# Altium PCB SFCmasterD.PcbDoc (part 6 of 7)
Units mm, origin at the board's own origin, x right, y up, seen from the top; angles counter-clockwise.
Board outline 152.4 x 101.6 mm, 2 copper layers (Top Layer, Bottom Layer); 249 components, 250 nets, 987 pads, 265 vias.
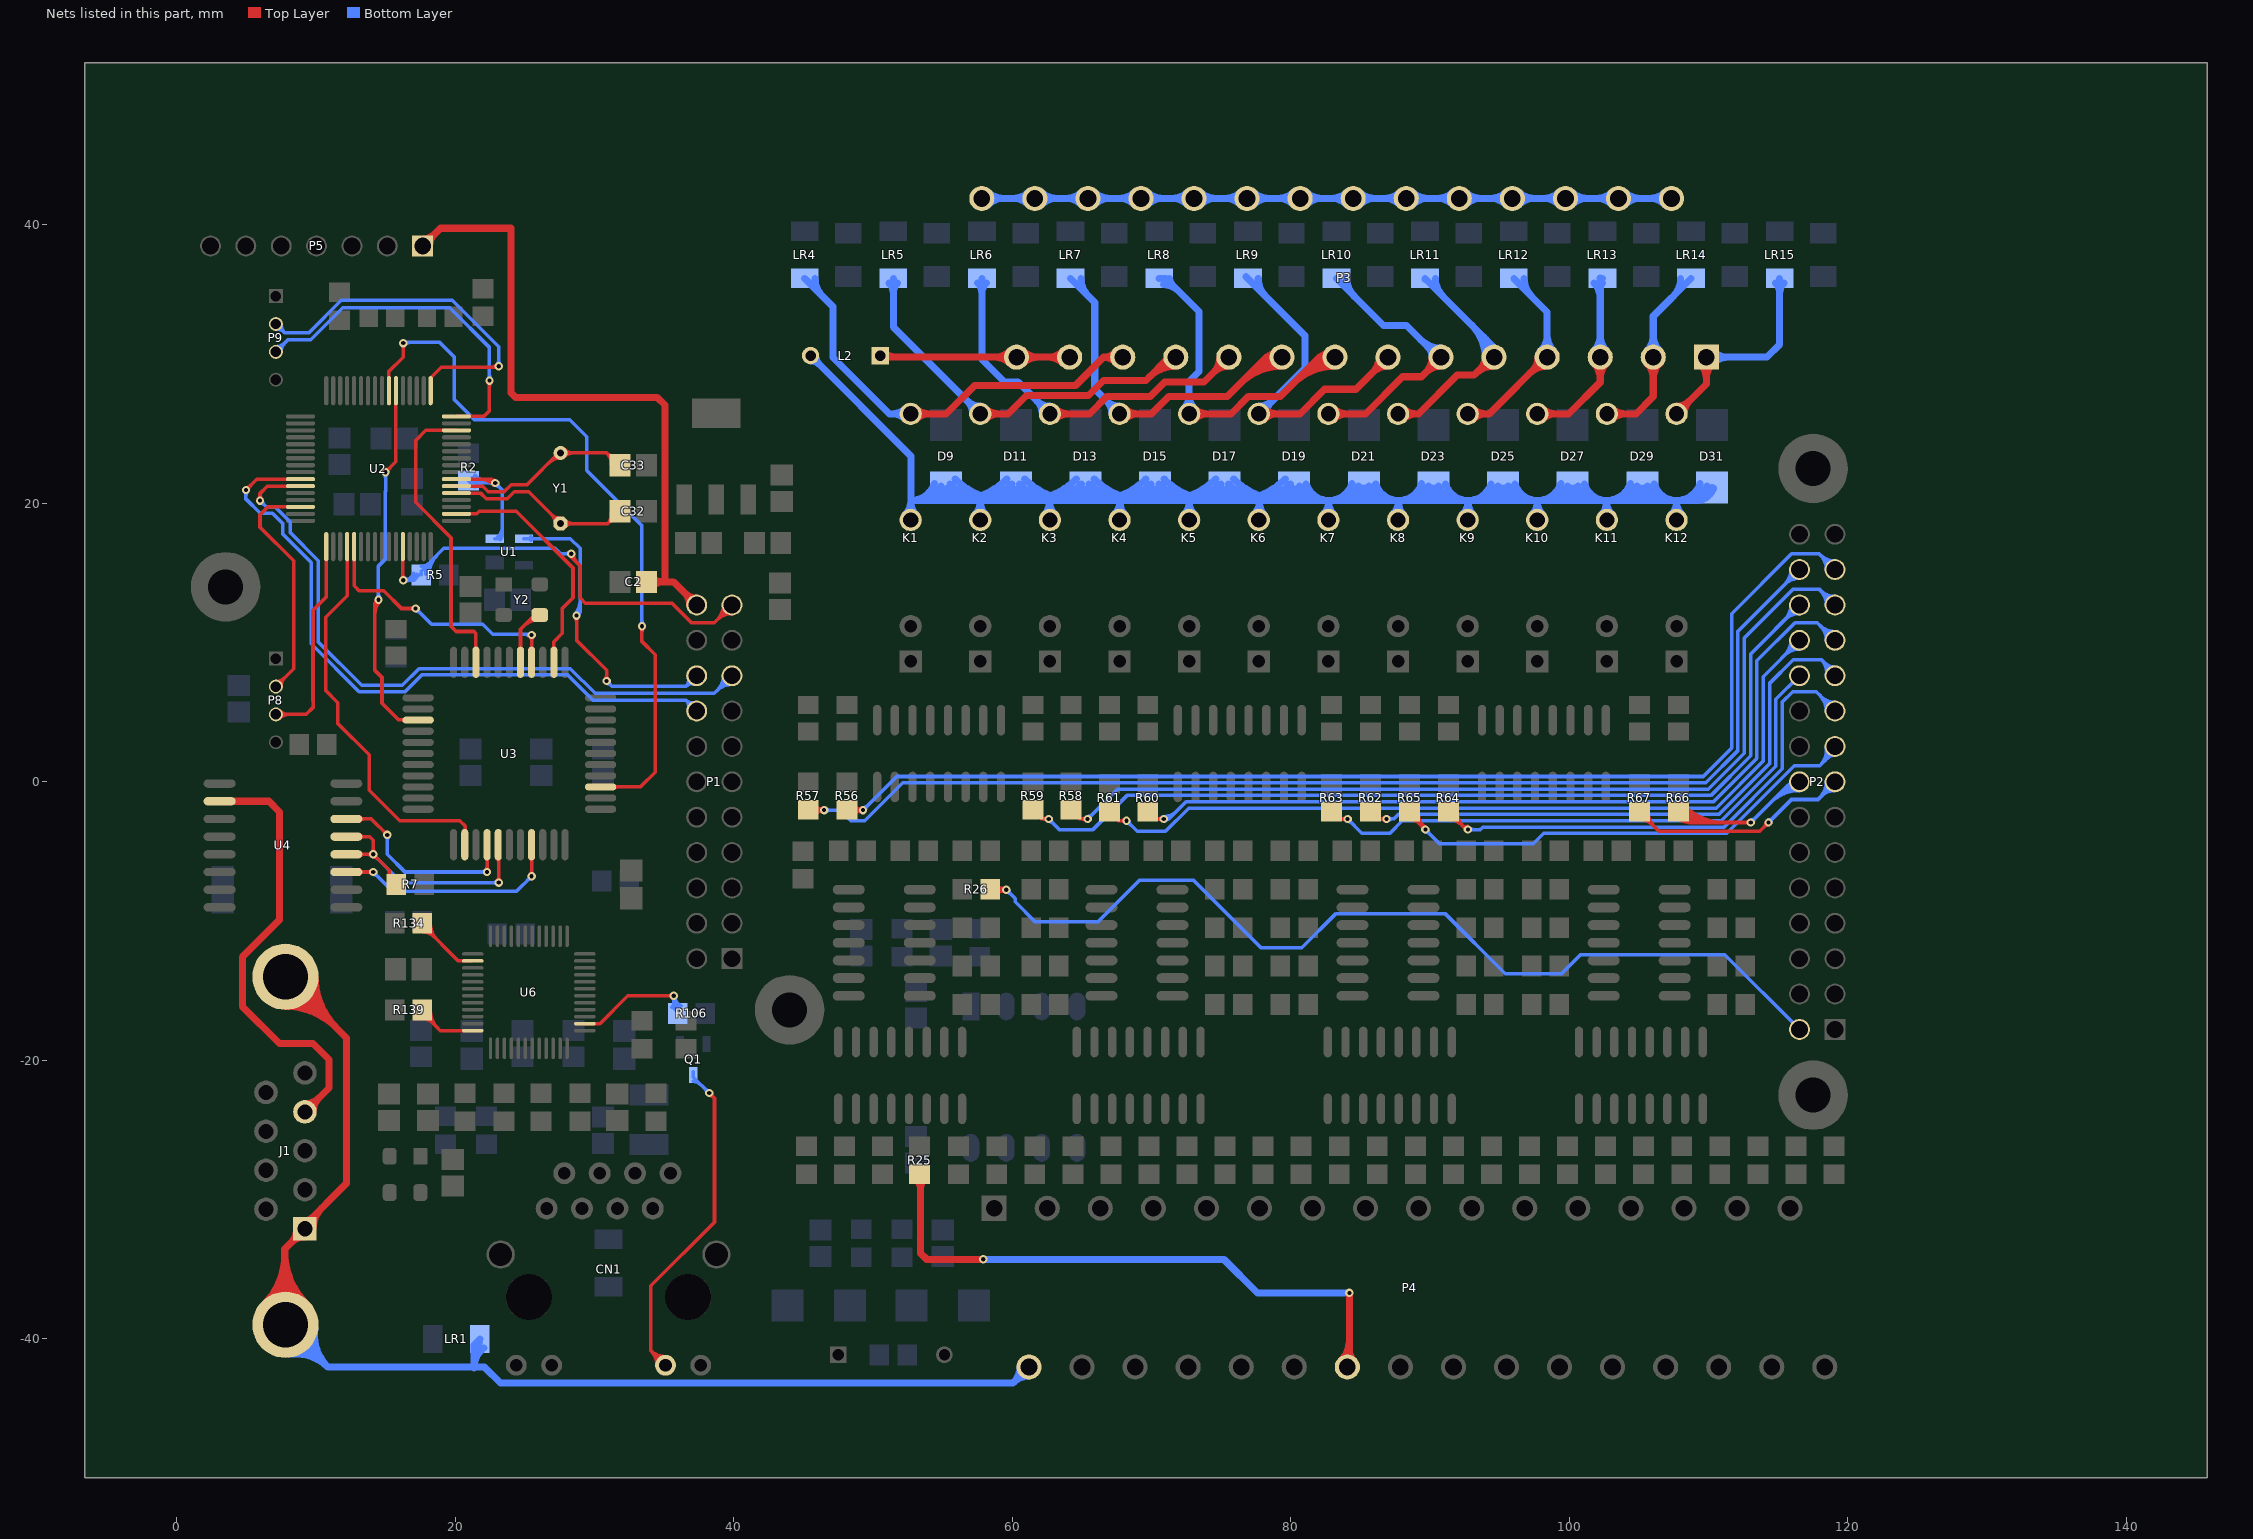
[diagram p6: the nets of this part, all layers, seen from the top]

## Via types
v1: diameter 0.6, hole 0.3, Top Layer to Bottom Layer, 265 vias

## Nets (pads, with @x,y where several pads share a name; then routed paths per layer and width w, separated by ;. In a path a pad name is that pad's centre, name@x,y a point inside that pad or via, vN(x,y) a via of type N, cw(c..) or ccw(c..) an arc to the next point about the centre after c; other vN are vias at no path point) (continued)
NetR106_1: R106.1 U6.14 | length 13
  Top Layer w0.254: U6.14@29.298,-17.363 30.385,-17.363 32.381,-15.367 v1(35.687,-15.367) ; v1@35.565,-15.489 ccw(c35.269,-15.785) 35.269,-15.367 ccw(c35.269,-14.949) v1@35.565,-15.245
  Bottom Layer w0.25: R106.1@35.55,-16.18 ccw(c35.221,-15.851) 35.687,-15.851 ; v1@35.563,-15.491 cw(c35.265,-15.789) 35.687,-15.789 cw(c36.109,-15.789) v1@35.811,-15.491 ; v1@35.623,-15.53 cw(c35.501,-15.842) 35.825,-15.756 ; v1@35.687,-15.639 ccw(c36.415,-15.639) R106.1@36.098,-16.294 ; 35.753,-15.885 cw(c36.23,-15.757) v1@35.829,-15.469 ; 35.808,-15.69 cw(c36.107,-15.61) v1@35.839,-15.454 ; R106.1@35.83,-16.383 35.83,-16.399 35.687,-16.256 35.687,-15.24 ccw(c36.608,-15.24) R106.1@36.207,-16.069
NetR134_2: R134.2 U6.38 | length 7.4
  Top Layer w0.254: R134.2@17.637,-10.783 cw(c17.637,-11.98) 18.484,-11.134 ; R134.2@17.764,-10.414 20.213,-12.863 U6.38@21.248,-12.863 ; R134.2@17.956,-10.21 ccw(c18.912,-10.21) R134.2@18.236,-10.886 ; R134.2@18.21,-10.21 ccw(c19.779,-10.21) 18.67,-11.32
NetR139_2: R139.2 U6.48 | length 7.2
  Top Layer w0.25: R139.2@17.637,-17.008 cw(c17.637,-18.028) 18.358,-17.307 ; R139.2@17.637,-16.586 18.914,-17.863 U6.48@21.248,-17.863 ; R139.2@17.962,-16.433 ccw(c19.115,-16.433) 18.3,-17.248 ; R139.2@18.212,-16.433 ccw(c19.969,-16.433) 18.727,-17.675
OSC_IN: C32.2 U2.5 Y1.1 | length 18.5
  Top Layer w0.254: U2.5@20.078,20.738 21.807,20.738 22.225,20.32 23.718,20.32 24.226,20.828 25.273,20.828 Y1.1@27.559,18.542 30.927,18.542 ; Y1.1@27.186,18.542 ccw(c26.286,18.542) 26.922,19.179 ccw(c27.559,19.815) Y1.1@27.559,18.915 ; Y1.1@27.823,18.278 cw(c28.459,17.642) 28.459,18.542 cw(c28.459,19.442) Y1.1@27.823,18.806 ; C32.2@31.197,19.312 cw(c30.262,19.207) 30.927,18.542 ; C32.2@31.26,18.875 cw(c31.635,18.501) C32.2@31.742,19.02 ; C32.2@31.69,18.771 ccw(c31.521,17.948) 30.927,18.542 ; C32.2@31.816,19.431 30.927,18.542
OSC_OUT: C33.2 U2.6 Y1.2 | length 19.2
  Top Layer w0.254: U2.6@20.078,21.218 21.969,21.218 22.359,20.828 23.495,20.828 24.003,21.336 25.146,21.336 27.432,23.622 30.861,23.622 ; 26.705,22.895 cw(c27.559,22.042) Y1.2@27.559,23.249 ; 27.012,23.202 ccw(c26.592,23.622) Y1.2@27.186,23.622 ; 27.139,23.329 cw(c27.559,22.909) Y1.2@27.559,23.503 ; Y1.2@27.823,23.358 cw(c28.459,22.722) 28.459,23.622 cw(c28.459,24.522) Y1.2@27.823,23.886 ; C33.2@31.184,23.299 ccw(c31.599,23.714) C33.2@31.732,23.142 ; C33.2@31.193,22.796 ccw(c30.059,22.82) 30.861,23.622 ; C33.2@31.674,23.39 cw(c31.477,24.238) 30.861,23.622 ; C33.2@31.846,22.637 30.861,23.622
RMT_STARTUP_IN: P2.2 R26.2 | length 72.3
  Top Layer w0.254: R26.2@58.404,-7.715 58.436,-7.747 v1(59.563,-7.747) ; R26.2@58.85,-7.406 ccw(c59.563,-6.832) v1(59.563,-7.747) ; R26.2@58.868,-8.102 cw(c59.563,-8.605) v1(59.563,-7.747) ; v1@59.413,-7.833 ccw(c59.052,-8.042) 59.16,-7.639 ccw(c59.268,-7.235) v1@59.477,-7.597 ; v1@59.413,-7.66 cw(c59.052,-7.452) 59.16,-7.855 cw(c59.268,-8.259) v1@59.476,-7.897 ; v1@59.441,-7.869 ccw(c59.145,-8.165) 59.145,-7.747 ccw(c59.145,-7.329) v1@59.441,-7.625
  Bottom Layer w0.254: v1@59.563,-7.92 cw(c59.563,-8.338) 59.858,-8.042 cw(c60.154,-7.747) v1@59.736,-7.747 ; v1(59.563,-7.747) 60.198,-8.382 60.198,-8.622 61.609,-10.033 66.16,-10.033 69.109,-7.084 73.018,-7.084 77.853,-11.919 80.784,-11.919 83.244,-9.459 91.072,-9.459 95.39,-13.777 99.436,-13.777 100.795,-12.418 111.168,-12.418 P2.2@116.53,-17.78
RMT_STARTUP_PORT: P4.14 R25.2 | length 47.3
  Top Layer w0.508: R25.2@53.075,-28.493 cw(c52.264,-29.304) 53.411,-29.304 ; 53.411,-29.205 cw(c54.417,-29.205) R25.2@53.705,-28.493 ; R25.2@53.411,-28.178 53.411,-33.853 53.848,-34.29 v1(57.912,-34.29) ; P4.14@83.597,-41.565 ccw(c82.14,-40.108) 84.201,-40.108 ; P4.14@84.054,-42.022 84.201,-41.875 v1(84.201,-36.703) ; 84.201,-40.817 ccw(c85.259,-40.817) P4.14@84.511,-41.565
  Bottom Layer w0.508: v1@57.785,-34.29 75.184,-34.29 77.597,-36.703 v1(84.201,-36.703)
RTS(PIN4): J1.4 U4.10 | length 34.2
  Top Layer w0.508: U4.10@3.07,-1.397 6.604,-1.397 7.366,-2.159 7.366,-9.906 4.699,-12.573 4.699,-16.129 7.366,-18.796 9.779,-18.796 10.922,-19.939 10.922,-21.979 J1.4@9.199,-23.702 ; J1.4@9.199,-23.111 ccw(c9.199,-21.684) 10.208,-22.693 ccw(c11.217,-23.702) J1.4@9.79,-23.702
SHIELD_GND: J1.1 J1.10 J1.11 LR1.2 P4.2 | length 144.4
  Top Layer w0.508: J1.10@6.297,-37.492 ccw(c2.795,-33.99) 7.747,-33.99 ; J1.10@6.656,-37.851 ccw(c4.022,-35.217) 7.747,-35.217 ; J1.10@7.015,-38.21 ccw(c5.248,-36.443) 7.747,-36.443 ; J1.10@7.747,-39.243 7.747,-33.548 J1.1@9.199,-32.096 9.199,-31.822 12.192,-28.829 12.192,-18.397 J1.11@7.8,-14.005 ; 7.747,-36.187 ccw(c10.608,-36.187) J1.10@8.585,-38.21 ; 7.747,-34.961 ccw(c11.834,-34.961) J1.10@8.944,-37.851 ; 7.747,-33.734 ccw(c13.061,-33.734) J1.10@9.303,-37.492 ; J1.11@7.8,-16.131 cw(c7.8,-21.264) 11.429,-17.634 cw(c15.059,-14.005) J1.11@9.926,-14.005 ; J1.11@7.8,-15.623 cw(c7.8,-19.529) 10.562,-16.767 cw(c13.324,-14.005) J1.11@9.418,-14.005 ; J1.11@7.8,-15.115 cw(c7.8,-17.795) 9.695,-15.9 cw(c11.59,-14.005) J1.11@8.91,-14.005 ; J1.1@8.608,-32.096 cw(c7.181,-32.096) 8.19,-33.105 cw(c9.199,-34.114) J1.1@9.199,-32.687 ; J1.1@9.199,-31.505 ccw(c9.199,-30.74) J1.1@9.74,-31.281 ; J1.1@9.79,-32.096 cw(c11.878,-32.096) 10.402,-30.619
  Bottom Layer w0.508: J1.10@7.8,-38.995 10.842,-42.037 ; J1.10@8.014,-40.599 cw(c8.345,-43.08) 10.115,-41.31 cw(c11.885,-39.54) J1.10@9.404,-39.209 ; J1.10@8.081,-41.102 cw(c8.516,-44.363) 10.842,-42.037 ; J1.10@9.907,-39.276 ccw(c13.168,-39.711) 10.842,-42.037 ; 21.336,-42.09 cw(c23.146,-42.09) LR1.2@22.039,-40.658 ; 21.336,-41.055 cw(c22.346,-41.055) LR1.2@21.728,-40.256 ; LR1.2@21.766,-40.005 21.336,-40.435 21.336,-42.037 22.098,-42.037 ; P4.2@60.548,-42.022 cw(c58.988,-42.022) 60.091,-43.125 cw(c61.194,-44.228) P4.2@61.194,-42.668 ; P4.2@61.194,-42.022 60.047,-43.169 23.23,-43.169 22.098,-42.037 ; 10.842,-42.037 22.098,-42.037
SPEEDLED2: CN1.11 Q1.3 | length 29.6
  Top Layer w0.254: CN1.11@34.462,-41.889 ccw(c33.007,-41.875) 34.036,-40.846 ; CN1.11@34.716,-41.891 ccw(c33.855,-41.883) 34.464,-41.274 ccw(c35.073,-40.665) CN1.11@35.081,-41.526 ; CN1.11@35.079,-41.272 cw(c35.065,-39.817) 34.036,-40.846 ; CN1.11@35.085,-41.895 34.036,-40.846 ; v1@38.227,-22.525 cw(c38.227,-22.943) 38.522,-22.647 cw(c38.818,-22.352) v1@38.4,-22.352 ; v1(38.227,-22.352) 38.608,-22.733 38.608,-31.623 34.036,-36.195 34.036,-40.846
  Bottom Layer w0.254: Q1.3@37.084,-21.512 cw(c37.084,-22.244) 37.601,-21.726 ; Q1.3@37.084,-20.81 37.084,-21.209 v1(38.227,-22.352) ; v1@38.054,-22.352 ccw(c37.636,-22.352) 37.932,-22.057 ccw(c38.227,-21.761) v1@38.227,-22.179
SUB_SYS_BOOTSEL: P1.21 R5.2 U2.60 | length 43.5
  Top Layer w0.254: v1@16.134,14.6 ccw(c15.906,14.828) 16.228,14.828 ; v1@16.228,14.351 U2.60@16.228,16.888 ; 16.228,14.963 ccw(c16.741,14.963) v1@16.378,14.6 ; v1(28.321,16.383) 28.321,16.129 28.956,15.494 28.956,13.208 29.337,12.827 35.56,12.827 36.957,11.43 38.6,11.43 P1.21@39.87,12.7 ; v1@28.494,16.383 ccw(c29.525,16.383) 28.796,15.654 ; P1.21@39.247,12.7 cw(c37.743,12.7) 38.806,11.636 cw(c39.87,10.573) P1.21@39.87,12.077 ; P1.21@39.501,12.7 cw(c38.61,12.7) 39.24,12.07 cw(c39.87,11.44) P1.21@39.87,12.331
  Bottom Layer w0.254: v1(16.256,14.478) v1@16.256,14.462 ; v1@16.363,14.614 ccw(c16.546,14.846) 16.623,14.56 ccw(c16.715,14.218) v1@16.407,14.393 ; v1@16.378,14.356 cw(c16.635,14.099) 16.635,14.462 ; v1@16.378,14.6 ccw(c16.712,14.934) 16.712,14.462 ; 16.611,14.462 ccw(c16.611,15.127) R5.2@17.24,14.912 ; R5.2@17,14.994 cw(c16.256,15.248) v1@16.256,14.462 ; R5.2@17.415,14.859 17.018,14.462 v1@16.256,14.462 ; R5.2@17.542,14.859 17.542,15.129 19.177,16.764 27.178,16.764 27.559,16.383 v1(28.321,16.383) ; R5.2@17.542,15.482 ccw(c17.542,16.334) 18.145,15.732 ; R5.2@17.861,14.909 cw(c19.162,14.909) 18.242,15.829 ; R5.2@18.115,14.909 cw(c20.029,14.909) 18.676,16.263 ; v1@28.199,16.261 ccw(c27.903,15.965) 27.903,16.383 ccw(c27.903,16.801) v1@28.199,16.505
SUB_SYS_RST: P1.18 U1.3 | length 27.2
  Top Layer w0.254: v1@28.58,11.816 cw(c28.284,11.52) 28.702,11.52 cw(c29.12,11.52) v1@28.824,11.816 ; v1(28.702,11.938) 28.702,10.16 30.861,8.001 v1(30.861,7.239) ; v1@30.739,7.361 ccw(c30.443,7.657) 30.861,7.657 ccw(c31.279,7.657) v1@30.983,7.361
  Bottom Layer w0.254: U1.3@24.926,17.46 28.26,17.46 28.956,16.764 28.956,12.192 v1(28.702,11.938) ; U1.3@25.398,17.338 cw(c25.694,17.042) 25.694,17.46 cw(c25.694,17.878) U1.3@25.398,17.582 ; v1@28.58,12.06 ccw(c27.671,12.969) 28.956,12.969 ; v1@28.759,11.881 ccw(c28.284,12.356) 28.956,12.356 ; v1@30.861,7.066 cw(c30.861,6.648) 31.156,6.944 cw(c31.452,7.239) v1@31.034,7.239 ; v1(30.861,7.239) 31.242,6.858 36.568,6.858 ; P1.18@36.728,7.458 cw(c36.129,7.297) 36.568,6.858 ; P1.18@37.168,7.018 ccw(c37.007,6.419) 36.568,6.858 ; P1.18@37.33,7.62 36.568,6.858
SYS_NRST: R2.1 U1.2 U2.7 | length 18.1
  Top Layer w0.254: U2.7@20.078,21.738 22.585,21.738 ; 21.777,21.738 cw(c21.777,20.38) v1@22.738,21.341 ; 22.391,21.738 cw(c22.391,20.994) v1@22.917,21.52 ; v1@22.687,21.472 ccw(c22.336,21.49) 22.585,21.738 ; v1@22.851,21.636 cw(c22.833,21.987) 22.585,21.738 ; v1(22.86,21.463) 22.585,21.738
  Bottom Layer w0.254: R2.1@20.955,21.606 21.098,21.463 v1(22.86,21.463) 23.368,20.955 23.368,17.653 23.175,17.46 U1.2@22.826,17.46 ; R2.1@21.231,21.832 ccw(c22.12,22.721) 22.12,21.463 ; R2.1@21.41,21.201 cw(c22.043,20.568) 22.043,21.463 ; R2.1@21.41,22.011 ccw(c22.734,23.335) v1@22.734,21.463 ; 22.374,21.556 ccw(c22.505,22.065) v1@22.772,21.612 ; 22.522,21.518 cw(c22.444,21.218) v1@22.711,21.375 ; v1@22.738,21.341 ccw(c22.442,21.045) 22.442,21.463 ccw(c22.442,21.881) v1@22.738,21.585 ; v1@22.86,21.29 cw(c22.86,20.872) 23.155,21.168 cw(c23.451,21.463) v1@23.033,21.463 ; U1.2@23.054,17.582 ccw(c22.295,18.341) 23.368,18.341 ; U1.2@23.233,17.403 ccw(c22.908,17.728) U1.2@23.368,17.728
SYS_SWCLK: P8.3 U2.49 | length 16.3
  Top Layer w0.254: P8.3@7.112,4.842 9.287,4.842 9.779,5.334 9.779,5.835 9.776,5.838 9.776,12.316 10.728,13.268 U2.49@10.728,16.951 ; P8.3@7.376,4.578 cw(c8.012,3.941) 8.012,4.842 cw(c8.012,5.742) P8.3@7.376,5.106
SYS_SWDIO: P8.2 U2.46 | length 18.4
  Top Layer w0.254: P8.2@7.112,6.842 8.382,8.112 8.382,15.875 5.969,18.288 5.969,19.177 6.53,19.738 U2.46@8.878,19.738 U2.46@8.901,19.715 ; P8.2@7.112,7.215 ccw(c7.112,8.115) 7.749,7.479 ccw(c8.385,6.842) P8.2@7.485,6.842
USART2_RX: P9.2 U2.17 | length 28.7
  Top Layer w0.254: U2.17@18.228,28.088 18.228,29.023 18.977,29.772 23.077,29.772 v1@23.114,29.809 ; 22.52,29.772 ccw(c22.52,30.439) v1@22.992,29.967
  Bottom Layer w0.254: P9.2@7.112,32.877 7.731,32.258 ; P9.2@7.12,32.504 cw(c7.137,31.664) 7.731,32.258 ; P9.2@7.485,32.869 ccw(c8.325,32.852) 7.731,32.258 ; v1@22.992,29.967 ccw(c22.696,30.263) 23.114,30.263 ccw(c23.532,30.263) v1@23.236,29.967 ; v1(23.114,29.845) 23.114,31.242 19.781,34.575 11.807,34.575 9.49,32.258 7.731,32.258
USART2_TX: P9.3 U2.16 | length 27.6
  Top Layer w0.254: U2.16@20.078,26.238 22.038,26.238 22.449,26.649 v1(22.449,28.808) ; v1@22.327,28.686 cw(c22.031,28.391) 22.449,28.391 cw(c22.867,28.391) v1@22.571,28.686
  Bottom Layer w0.254: P9.3@7.112,30.877 7.977,31.742 9.616,31.742 11.91,34.036 19.607,34.036 22.449,31.194 v1(22.449,28.808) ; P9.3@7.112,31.25 ccw(c7.112,32.15) 7.749,31.514 ccw(c8.385,30.877) P9.3@7.485,30.877 ; v1@22.327,28.931 ccw(c22.031,29.226) 22.449,29.226 ccw(c22.867,29.226) v1@22.571,28.931
USART_DP_RX: P1.16 U2.42 | length 51
  Top Layer w0.254: v1(4.962,20.955) 5.746,21.738 U2.42@8.878,21.738 ; v1@4.962,21.128 ccw(c4.962,21.546) 5.258,21.25 ccw(c5.553,20.955) v1@5.135,20.955
  Bottom Layer w0.254: v1@4.84,20.833 cw(c4.545,20.537) 4.962,20.537 cw(c5.38,20.537) v1@5.085,20.833 ; v1(4.962,20.955) 4.962,20.311 5.977,19.296 6.864,19.296 7.62,18.54 7.62,17.78 9.652,15.748 9.652,9.906 13.081,6.477 16.383,6.477 17.58,7.674 28.073,7.674 29.905,5.842 36.568,5.842 ; P1.16@36.728,5.242 ccw(c36.129,5.403) 36.568,5.842 ; P1.16@37.168,5.682 cw(c37.007,6.281) 36.568,5.842 ; P1.16@37.33,5.08 36.568,5.842
USART_DP_TX: P1.17 U2.43 | length 53.7
  Top Layer w0.254: v1@5.847,20.315 ccw(c5.551,20.611) 5.969,20.611 ccw(c6.387,20.611) v1@6.091,20.315 ; v1(5.969,20.193) 5.969,20.701 6.483,21.215 8.855,21.215 U2.43@8.878,21.238
  Bottom Layer w0.254: v1@5.969,20.02 cw(c5.969,19.602) 6.264,19.898 cw(c6.56,20.193) v1@6.142,20.193 ; v1(5.969,20.193) 6.412,19.75 7.052,19.75 8.128,18.674 8.128,17.914 10.16,15.882 10.16,10.04 13.269,6.931 16.195,6.931 17.392,8.128 28.261,8.128 30.039,6.35 38.6,6.35 P1.17@39.87,7.62 ; P1.17@39.247,7.62 cw(c37.743,7.62) 38.806,6.556 cw(c39.87,5.493) P1.17@39.87,6.997 ; P1.17@39.501,7.62 cw(c38.61,7.62) 39.24,6.99 cw(c39.87,6.36) P1.17@39.87,7.251
VALVE_DRIVER1_ON: K3.3 LR6.1 P3.19 | length 35.1
  Top Layer w0.508: K3.3@62.696,26.424 65.54,26.424 66.802,27.686 69.927,27.686 70.943,28.702 73.752,28.702 P3.19@75.545,30.495 ; K3.3@63.082,26.038 cw(c64.014,25.106) 64.014,26.424 cw(c64.014,27.742) K3.3@63.082,26.81 ; P3.19@74.899,30.495 cw(c73.339,30.495) 74.442,29.392 cw(c75.545,28.289) P3.19@75.545,29.849
  Bottom Layer w0.508: LR6.1@57.5,35.831 cw(c56.739,35.069) 57.816,35.069 cw(c58.893,35.069) LR6.1@58.131,35.831 ; LR6.1@57.816,36.146 57.816,30.322 59.436,28.702 60.418,28.702 K3.3@62.696,26.424 ; K3.3@62.15,26.424 ccw(c60.832,26.424) 61.764,27.356 ccw(c62.696,28.288) K3.3@62.696,26.97
VALVE_DRIVER2_ON: K4.3 LR7.1 P3.17 | length 38.5
  Top Layer w0.508: K4.3@67.696,26.424 69.977,26.424 71.239,27.686 75.438,27.686 78.247,30.495 ; K4.3@68.082,26.038 cw(c69.014,25.106) 69.014,26.424 cw(c69.014,27.742) K4.3@68.082,26.81 ; 76.361,28.609 cw(c79.355,25.614) P3.17@79.355,29.849 ; 77.228,29.476 cw(c79.355,27.349) P3.17@79.355,30.357 ; 78.095,30.343 cw(c79.355,29.083) P3.17@79.355,30.865 ; P3.17@78.793,30.177 ccw(c78.247,29.868) 78.247,30.495 ; P3.17@78.793,30.813 cw(c78.247,31.122) 78.247,30.495 ; P3.17@79.355,30.495 78.247,30.495
  Bottom Layer w0.508: LR7.1@64.181,36.146 65.913,34.414 65.913,28.207 K4.3@67.696,26.424 ; LR7.1@64.927,36.146 ccw(c66.728,36.146) 65.455,34.872 ; K4.3@67.15,26.424 ccw(c65.832,26.424) 66.764,27.356 ccw(c67.696,28.288) K4.3@67.696,26.97
VALVE_DRIVER3_ON: K5.3 LR8.1 P3.15 | length 37.9
  Top Layer w0.508: K5.3@72.696,26.424 75.7,26.424 76.962,27.686 79.248,27.686 82.057,30.495 ; K5.3@73.082,26.038 cw(c74.014,25.106) 74.014,26.424 cw(c74.014,27.742) K5.3@73.082,26.81 ; 80.171,28.609 cw(c83.165,25.614) P3.15@83.165,29.849 ; 81.038,29.476 cw(c83.165,27.349) P3.15@83.165,30.357 ; 81.905,30.343 cw(c83.165,29.083) P3.15@83.165,30.865 ; P3.15@82.603,30.177 ccw(c82.057,29.868) 82.057,30.495 ; P3.15@82.603,30.813 cw(c82.057,31.122) 82.057,30.495 ; P3.15@83.165,30.495 82.057,30.495
  Bottom Layer w0.508: LR8.1@70.547,36.146 71.042,36.146 73.406,33.782 73.406,29.464 72.696,28.754 K5.3@72.696,26.424 ; LR8.1@70.847,35.7 cw(c70.847,34.151) 71.942,35.246 ; LR8.1@71.293,36.146 ccw(c71.897,36.146) LR8.1@71.47,35.718 ; K5.3@72.31,26.81 ccw(c71.378,27.742) 72.696,27.742 ccw(c74.014,27.742) K5.3@73.082,26.81
VALVE_DRIVER4_ON: K6.3 LR9.1 P3.13 | length 32
  Top Layer w0.508: K6.3@77.696,26.424 80.653,26.424 82.423,28.194 84.674,28.194 P3.13@86.975,30.495 ; K6.3@78.082,26.038 cw(c79.014,25.106) 79.014,26.424 cw(c79.014,27.742) K6.3@78.082,26.81 ; P3.13@86.329,30.495 cw(c84.769,30.495) 85.872,29.392 cw(c86.975,28.289) P3.13@86.975,29.849
  Bottom Layer w0.508: LR9.1@76.785,36.272 81.026,32.032 81.026,29.718 77.732,26.424 K6.3@77.696,26.424 ; LR9.1@77.658,36.146 ccw(c79.459,36.146) 78.185,34.872 ; K6.3@77.696,26.97 ccw(c77.696,28.375) 78.69,27.382 ; K6.3@78.242,26.424 cw(c79.473,26.424) 78.603,27.295
VALVE_DRIVER5_ON: K7.3 LR10.1 P3.11 | length 28
  Top Layer w0.508: K7.3@82.696,26.424 85.352,26.424 88.019,29.091 89.381,29.091 P3.11@90.785,30.495 ; K7.3@83.082,26.038 cw(c84.014,25.106) 84.014,26.424 cw(c84.014,27.742) K7.3@83.082,26.81 ; P3.11@90.139,30.495 cw(c88.579,30.495) 89.682,29.392 cw(c90.785,28.289) P3.11@90.785,29.849
  Bottom Layer w0.508: LR10.1@83.277,36.146 86.657,32.766 88.304,32.766 90.575,30.495 P3.11@90.785,30.495 ; LR10.1@84.023,36.146 ccw(c85.824,36.146) 84.551,34.872 ; 89.323,31.746 ccw(c90.785,33.208) P3.11@90.785,31.141 ; 89.831,31.239 cw(c89.087,30.495) P3.11@90.139,30.495
VALVE_DRIVER6_ON: K8.3 LR11.1 P3.9 | length 26.3
  Top Layer w0.508: K8.3@87.696,26.424 89.162,26.424 91.948,29.21 93.148,29.21 P3.9@94.433,30.495 ; K8.3@88.082,26.038 cw(c89.014,25.106) 89.014,26.424 cw(c89.014,27.742) K8.3@88.082,26.81 ; 93.216,29.278 cw(c94.595,27.898) P3.9@94.595,29.849 ; 93.607,29.669 ccw(c92.781,30.495) P3.9@93.949,30.495
  Bottom Layer w0.508: LR11.1@89.643,36.082 LR11.1@89.643,36.146 94.595,31.194 P3.9@94.595,30.495 ; LR11.1@90.389,36.146 ccw(c92.19,36.146) 90.916,34.872 ; 92.998,32.791 cw(c90.703,30.495) P3.9@93.949,30.495 ; 93.865,31.923 cw(c92.437,30.495) P3.9@94.457,30.495
VALVE_DRIVER7_ON: K9.3 LR12.1 P3.7 | length 22.6
  Top Layer w0.508: K9.3@92.696,26.424 94.242,26.424 98.313,30.495 P3.7@98.405,30.495 P3.7@98.559,30.495 ; K9.3@93.082,26.038 cw(c94.014,25.106) 94.014,26.424 cw(c94.014,27.742) K9.3@93.082,26.81 ; 97.145,29.327 cw(c98.405,28.067) P3.7@98.405,29.849 ; 97.367,29.549 ccw(c96.422,30.495) P3.7@97.759,30.495
  Bottom Layer w0.508: LR12.1@96.008,36.146 98.405,33.749 P3.7@98.405,30.495 ; LR12.1@96.754,36.146 ccw(c98.555,36.146) 97.282,34.872 ; P3.7@97.948,30.952 ccw(c96.845,32.055) 98.405,32.055 ccw(c99.965,32.055) P3.7@98.862,30.952
VALVE_DRIVER8_ON: K10.3 LR13.1 P3.5 | length 21.8
  Top Layer w0.508: K10.3@97.696,26.424 99.949,26.424 102.215,28.69 P3.5@102.215,30.495 ; K10.3@98.082,26.038 cw(c99.014,25.106) 99.014,26.424 cw(c99.014,27.742) K10.3@98.082,26.81 ; P3.5@101.758,30.038 cw(c100.655,28.935) 102.215,28.935 cw(c103.775,28.935) P3.5@102.672,30.038
  Bottom Layer w0.508: P3.5@101.758,30.952 ccw(c100.655,32.055) 102.215,32.055 ccw(c103.775,32.055) P3.5@102.672,30.952 ; LR13.1@101.758,35.831 cw(c100.655,34.728) 102.215,34.728 ; P3.5@102.215,30.495 LR13.1@102.215,36.195 ; 102.215,35.411 cw(c102.809,35.411) LR13.1@102.389,35.831 ; LR13.1@102.215,35.988 LR13.1@102.373,36.146
VALVE_DRIVER9_ON: K11.3 LR14.1 P3.3 | length 21.8
  Top Layer w0.508: K11.3@102.696,26.424 104.775,26.424 106.025,27.674 P3.3@106.025,30.495 ; K11.3@103.082,26.038 cw(c104.014,25.106) 104.014,26.424 cw(c104.014,27.742) K11.3@103.082,26.81 ; P3.3@105.568,30.038 cw(c104.465,28.935) 106.025,28.935 cw(c107.585,28.935) P3.3@106.482,30.038
  Bottom Layer w0.508: P3.3@105.568,30.952 ccw(c104.465,32.055) 106.025,32.055 ccw(c107.585,32.055) P3.3@106.482,30.952 ; P3.3@106.025,30.495 106.025,33.432 LR14.1@108.739,36.146 ; 107.465,34.872 ccw(c106.192,36.146) LR14.1@107.993,36.146
VALVE_DRIVER10_ON: K12.3 LR15.1 P3.1 | length 24
  Top Layer w0.508: K12.3@107.696,26.424 109.835,28.563 P3.1@109.835,30.495 ; K12.3@107.696,26.97 ccw(c107.696,28.288) 108.628,27.356 ccw(c109.56,26.424) K12.3@108.242,26.424 ; P3.1@109.378,30.038 cw(c108.275,28.935) 109.835,28.935 cw(c111.395,28.935) P3.1@110.292,30.038
  Bottom Layer w0.508: P3.1@109.835,30.495 114.188,30.495 115.104,31.411 LR15.1@115.104,36.146 ; P3.1@110.292,30.038 cw(c111.395,28.935) 111.395,30.495 cw(c111.395,32.055) P3.1@110.292,30.952 ; LR15.1@114.789,35.831 cw(c114.028,35.069) 115.104,35.069 cw(c116.181,35.069) LR15.1@115.42,35.831
VALVE_DRIVER_L: D9.2 D11.2 D13.2 D15.2 D17.2 D19.2 D21.2 D23.2 D25.2 D27.2 D29.2 D31.2 K1.2 K2.2 K3.2 K4.2 K5.2 K6.2 K7.2 K8.2 K9.2 K10.2 K11.2 K12.2 L2.2 | length 297.7
  Bottom Layer w0.508: L2.2@45.506,30.236 cw(c45.506,29.34) 46.139,29.974 cw(c46.773,30.607) L2.2@45.877,30.607 ; L2.2@45.506,30.607 52.705,23.408 52.705,20.201 ; K1.2@52.31,19.19 ccw(c51.356,20.144) 52.705,20.144 ; K1.2@52.705,18.677 52.705,20.201 ; 52.705,20.1 ccw(c53.993,20.1) K1.2@53.082,19.19 ; 53.414,20.201 ccw(c53.414,21.747) D9.2@54.878,21.251 ; D9.2@54.122,20.201 ccw(c54.122,21.507) D9.2@55.359,21.087 ; D9.2@54.396,21.414 cw(c52.705,21.987) 52.705,20.201 ; D9.2@54.801,20.682 ccw(c55.962,21.843) D9.2@55.962,20.201 ; D9.2@55.16,21.041 ccw(c57.188,23.069) 57.188,20.201 ; D9.2@55.519,21.4 ccw(c58.415,24.296) 58.415,20.201 ; D9.2@55.848,20.201 ccw(c55.848,25.522) D11.2@59.611,21.76 ; D9.2@55.879,21.76 ccw(c59.641,25.522) D11.2@59.641,20.201 ; 57.074,20.201 ccw(c57.074,24.296) D11.2@59.97,21.4 ; K2.2@57.312,19.192 ccw(c56.402,20.112) 57.696,20.112 ; K2.2@57.696,18.804 57.696,20.112 ; K2.2@58.08,19.192 cw(c58.99,20.112) 57.696,20.112 ; 58.301,20.201 ccw(c58.301,23.069) D11.2@60.329,21.041 ; D11.2@59.527,20.201 ccw(c59.527,21.843) D11.2@60.688,20.682 ; D11.2@59.8,20.682 ccw(c60.961,21.843) D11.2@60.961,20.201 ; D11.2@60.159,21.041 ccw(c62.188,23.069) 62.188,20.201 ; D11.2@60.519,21.4 ccw(c63.414,24.296) 63.414,20.201 ; D11.2@60.847,20.201 ccw(c60.847,25.522) D13.2@64.61,21.76 ; D11.2@60.878,21.76 ccw(c64.64,25.522) D13.2@64.64,20.201 ; 62.073,20.201 ccw(c62.073,24.296) D13.2@64.969,21.4 ; K3.2@62.31,19.19 ccw(c61.491,20.009) 62.649,20.009 ; K3.2@62.649,18.804 62.649,20.201 ccw(c64.045,20.201) K3.2@63.075,19.197 ; 63.3,20.201 ccw(c63.3,23.069) D13.2@65.328,21.041 ; D13.2@64.526,20.201 ccw(c64.526,21.843) D13.2@65.687,20.682 ; D13.2@64.799,20.682 ccw(c65.96,21.843) D13.2@65.96,20.201 ; D13.2@65.159,21.041 ccw(c67.187,23.069) 67.187,20.201 ; D13.2@65.518,21.4 ccw(c68.413,24.296) 68.413,20.201 ; D13.2@65.846,20.201 ccw(c65.846,25.522) D15.2@69.609,21.76 ; D13.2@65.877,21.76 ccw(c69.64,25.522) D15.2@69.64,20.201 ; 67.073,20.201 ccw(c67.073,24.296) D15.2@69.968,21.4 ; K4.2@67.312,19.193 ccw(c66.317,20.201) 67.734,20.201 K4.2@67.734,18.804 ; 67.734,20.03 ccw(c68.922,20.03) K4.2@68.082,19.19 ; 68.299,20.201 ccw(c68.299,23.069) D15.2@70.327,21.041 ; D15.2@69.526,20.201 ccw(c69.526,21.843) D15.2@70.687,20.682 ; D15.2@69.798,20.682 ccw(c70.96,21.843) D15.2@70.96,20.201 ; D15.2@70.158,21.041 ccw(c72.186,23.069) 72.186,20.201 ; D15.2@70.517,21.4 ccw(c73.412,24.296) 73.412,20.201 ; D15.2@70.845,20.201 ccw(c70.845,25.522) D17.2@74.608,21.76 ; D15.2@70.876,21.76 ccw(c74.639,25.522) D17.2@74.639,20.201 ; 72.072,20.201 ccw(c72.072,24.296) D17.2@74.967,21.4 ; K5.2@72.31,19.19 ccw(c71.412,20.088) 72.682,20.088 ; K5.2@72.682,18.804 72.682,20.201 ; 72.682,20.156 ccw(c74.048,20.156) K5.2@73.082,19.19 ; 73.298,20.201 ccw(c73.298,23.069) D17.2@75.327,21.041 ; D17.2@74.525,20.201 ccw(c74.525,21.843) D17.2@75.686,20.682 ; D17.2@74.798,20.682 ccw(c75.959,21.843) D17.2@75.959,20.201 ; D17.2@75.157,21.041 ccw(c77.185,23.069) 77.185,20.201 ; D17.2@75.516,21.4 ccw(c78.412,24.296) 78.412,20.201 ; D17.2@75.845,20.201 ccw(c75.845,25.522) D19.2@79.607,21.76 ; D17.2@75.875,21.76 ccw(c79.638,25.522) D19.2@79.638,20.201 ; 77.071,20.201 ccw(c77.071,24.296) D19.2@79.967,21.4 ; K6.2@77.326,19.205 ccw(c76.408,20.201) 77.762,20.201 K6.2@77.762,18.804 ; 77.762,19.963 ccw(c78.855,19.963) K6.2@78.082,19.19 ; 78.297,20.201 ccw(c78.297,23.069) D19.2@80.326,21.041 ; D19.2@79.524,20.201 ccw(c79.524,21.843) D19.2@80.685,20.682 ; D19.2@80.127,21.089 ccw(c81.343,21.478) D19.2@81.343,20.201 ; D19.2@80.61,21.244 ccw(c82.038,21.7) 82.038,20.201 ; D19.2@81.094,21.399 ccw(c82.734,21.922) 82.734,20.201 ; K7.2@82.312,19.193 ccw(c81.317,20.201) 82.734,20.201 ; K7.2@82.734,18.804 82.734,20.201 ; 82.734,20.03 ccw(c83.922,20.03) K7.2@83.082,19.19 ; 83.433,20.201 ccw(c83.433,21.713) D21.2@84.871,21.246 ; D21.2@84.132,20.201 ccw(c84.132,21.486) D21.2@85.354,21.089 ; D21.2@84.388,21.403 cw(c82.734,21.94) 82.734,20.201 ; D21.2@85.126,21.089 ccw(c86.343,21.478) D21.2@86.343,20.201 ; D21.2@85.61,21.244 ccw(c87.038,21.701) 87.038,20.201 ; D21.2@86.094,21.399 ccw(c87.734,21.923) 87.734,20.201 ; K8.2@87.312,19.193 ccw(c86.317,20.201) 87.734,20.201 ; K8.2@87.734,18.804 87.734,20.201 ; 87.734,20.03 ccw(c88.922,20.03) K8.2@88.082,19.19 ; 88.433,20.201 ccw(c88.433,21.712) D23.2@89.87,21.246 ; D23.2@89.132,20.201 ccw(c89.132,21.485) D23.2@90.353,21.089 ; D23.2@89.387,21.402 cw(c87.734,21.939) 87.734,20.201 ; D23.2@90.125,21.089 ccw(c91.342,21.479) D23.2@91.342,20.201 ; D23.2@90.609,21.244 ccw(c92.038,21.702) 92.038,20.201 ; D23.2@91.093,21.399 ccw(c92.734,21.924) 92.734,20.201 ; K9.2@92.312,19.193 ccw(c91.317,20.201) 92.734,20.201 ; K9.2@92.734,18.804 92.734,20.201 ; 92.734,20.03 ccw(c93.922,20.03) K9.2@93.082,19.19 ; 93.433,20.201 ccw(c93.433,21.711) D25.2@94.869,21.246 ; D25.2@94.131,20.201 ccw(c94.131,21.485) D25.2@95.353,21.089 ; D25.2@94.386,21.402 cw(c92.734,21.938) 92.734,20.201 ; D25.2@95.124,21.091 ccw(c96.327,21.46) D25.2@96.327,20.201 ; D25.2@95.504,20.201 D25.2@95.744,20.201 ; D25.2@95.609,21.24 ccw(c97.014,21.67) 97.014,20.201 ; D25.2@96.095,21.388 ccw(c97.701,21.881) 97.701,20.201 ; K10.2@97.31,19.19 ccw(c96.366,20.134) 97.701,20.134 ; K10.2@97.701,18.804 97.701,20.201 ; 97.701,20.11 ccw(c99.002,20.11) K10.2@98.082,19.19 ; 98.409,20.201 ccw(c98.409,21.743) D27.2@99.87,21.25 ; D27.2@99.116,20.201 ccw(c99.116,21.504) D27.2@100.351,21.088 ; D27.2@99.389,21.413 cw(c97.701,21.982) 97.701,20.201 ; D27.2@100.122,21.093 ccw(c101.306,21.432) D27.2@101.306,20.201 ; D27.2@100.611,21.233 ccw(c101.98,21.625) 101.98,20.201 ; D27.2@101.099,21.373 ccw(c102.654,21.819) 102.654,20.201 ; K11.2@102.31,19.19 ccw(c101.479,20.021) 102.654,20.021 ; K11.2@102.654,18.804 102.654,20.201 ; K11.2@103.078,19.194 cw(c104.061,20.201) 102.654,20.201 ; 103.375,20.201 ccw(c103.375,21.79) D29.2@104.871,21.256 ; D29.2@104.095,20.201 ccw(c104.095,21.533) D29.2@105.35,21.086 ; D29.2@104.393,21.427 cw(c102.654,22.047) 102.654,20.201 ; D29.2@105.122,21.091 ccw(c106.324,21.458) D29.2@106.324,20.201 ; D29.2@105.608,21.239 ccw(c107.01,21.667) 107.01,20.201 ; D29.2@106.094,21.387 ccw(c107.696,21.876) 107.696,20.201 ; K12.2@107.31,19.19 ccw(c106.378,20.122) 107.696,20.122 ccw(c109.014,20.122) K12.2@108.082,19.19 ; K12.2@107.696,18.804 107.696,20.201 ; 108.405,20.201 ccw(c108.405,21.747) D31.2@109.868,21.251 ; D31.2@109.113,20.201 ccw(c109.113,21.506) D31.2@110.35,21.087 ; D31.2@109.387,21.414 cw(c107.696,21.987) 107.696,20.201 ; D31.2@110.236,21.126 109.311,20.201 107.696,20.201 ; 52.705,20.201 82.734,20.201 ; 82.734,20.201 87.734,20.201 ; 87.734,20.201 92.734,20.201 ; 92.734,20.201 97.701,20.201 ; 97.701,20.201 102.654,20.201 ; 102.654,20.201 107.696,20.201
VALVE_DRIVER_LO: L2.1 P3.25 P3.27 | length 22.4
  Top Layer w0.508: L2.1@50.506,30.607 50.618,30.495 P3.25@64.115,30.495 ; L2.1@50.768,30.345 cw(c51.131,29.982) 51.131,30.495 ; L2.1@50.768,30.869 ccw(c51.672,31.773) 51.672,30.495 ; P3.27@59.848,30.038 ccw(c58.745,28.935) 58.745,30.495 ccw(c58.745,32.055) P3.27@59.848,30.952 ; P3.27@60.762,30.038 cw(c61.865,28.935) 61.865,30.495 cw(c61.865,32.055) P3.27@60.762,30.952 ; P3.25@63.658,30.038 ccw(c62.555,28.935) 62.555,30.495 ccw(c62.555,32.055) P3.25@63.658,30.952
VALVE_DRIVER_N: P3.2 P3.4 P3.6 P3.8 P3.10 P3.12 P3.14 P3.16 P3.18 P3.20 P3.22 P3.24 P3.26 P3.28 | length 113.2
  Bottom Layer w0.508: P3.28@57.805,41.895 P3.26@61.615,41.895 P3.24@65.425,41.895 P3.22@69.235,41.895 P3.20@73.045,41.895 P3.18@76.855,41.895 P3.16@80.665,41.895 P3.14@84.475,41.895 P3.12@88.285,41.895 P3.10@92.095,41.895 P3.8@95.905,41.895 P3.6@99.715,41.895 P3.4@103.525,41.895 P3.2@107.335,41.895 ; P3.28@58.262,41.438 cw(c59.365,40.335) 59.365,41.895 cw(c59.365,43.455) P3.28@58.262,42.352 ; P3.26@61.158,41.438 ccw(c60.055,40.335) 60.055,41.895 ccw(c60.055,43.455) P3.26@61.158,42.352 ; P3.26@62.072,41.438 cw(c63.175,40.335) 63.175,41.895 cw(c63.175,43.455) P3.26@62.072,42.352 ; P3.24@64.968,41.438 ccw(c63.865,40.335) 63.865,41.895 ccw(c63.865,43.455) P3.24@64.968,42.352 ; P3.24@65.882,41.438 cw(c66.985,40.335) 66.985,41.895 cw(c66.985,43.455) P3.24@65.882,42.352 ; P3.22@68.778,41.438 ccw(c67.675,40.335) 67.675,41.895 ccw(c67.675,43.455) P3.22@68.778,42.352 ; P3.22@69.692,41.438 cw(c70.795,40.335) 70.795,41.895 cw(c70.795,43.455) P3.22@69.692,42.352 ; P3.20@72.588,41.438 ccw(c71.485,40.335) 71.485,41.895 ccw(c71.485,43.455) P3.20@72.588,42.352 ; P3.20@73.502,41.438 cw(c74.605,40.335) 74.605,41.895 cw(c74.605,43.455) P3.20@73.502,42.352 ; P3.18@76.398,41.438 ccw(c75.295,40.335) 75.295,41.895 ccw(c75.295,43.455) P3.18@76.398,42.352 ; P3.18@77.312,41.438 cw(c78.415,40.335) 78.415,41.895 cw(c78.415,43.455) P3.18@77.312,42.352 ; P3.16@80.208,41.438 ccw(c79.105,40.335) 79.105,41.895 ccw(c79.105,43.455) P3.16@80.208,42.352 ; P3.16@81.122,41.438 cw(c82.225,40.335) 82.225,41.895 cw(c82.225,43.455) P3.16@81.122,42.352 ; P3.14@84.018,41.438 ccw(c82.915,40.335) 82.915,41.895 ccw(c82.915,43.455) P3.14@84.018,42.352 ; P3.14@84.932,41.438 cw(c86.035,40.335) 86.035,41.895 cw(c86.035,43.455) P3.14@84.932,42.352 ; P3.12@87.828,41.438 ccw(c86.725,40.335) 86.725,41.895 ccw(c86.725,43.455) P3.12@87.828,42.352 ; P3.12@88.742,41.438 cw(c89.845,40.335) 89.845,41.895 cw(c89.845,43.455) P3.12@88.742,42.352 ; P3.10@91.638,41.438 ccw(c90.535,40.335) 90.535,41.895 ccw(c90.535,43.455) P3.10@91.638,42.352 ; P3.10@92.552,41.438 cw(c93.655,40.335) 93.655,41.895 cw(c93.655,43.455) P3.10@92.552,42.352 ; P3.8@95.448,41.438 ccw(c94.345,40.335) 94.345,41.895 ccw(c94.345,43.455) P3.8@95.448,42.352 ; P3.8@96.362,41.438 cw(c97.465,40.335) 97.465,41.895 cw(c97.465,43.455) P3.8@96.362,42.352 ; P3.6@99.258,41.438 ccw(c98.155,40.335) 98.155,41.895 ccw(c98.155,43.455) P3.6@99.258,42.352 ; P3.6@100.172,41.438 cw(c101.275,40.335) 101.275,41.895 cw(c101.275,43.455) P3.6@100.172,42.352 ; P3.4@103.068,41.438 ccw(c101.965,40.335) 101.965,41.895 ccw(c101.965,43.455) P3.4@103.068,42.352 ; P3.4@103.982,41.438 cw(c105.085,40.335) 105.085,41.895 cw(c105.085,43.455) P3.4@103.982,42.352 ; P3.2@106.878,41.438 ccw(c105.775,40.335) 105.775,41.895 ccw(c105.775,43.455) P3.2@106.878,42.352
VBAT_SRC: C2.1 P1.22 P5.1 | length 52.7
  Top Layer w0.508: P5.1@17.653,38.481 18.923,39.751 24.003,39.751 24.003,27.94 24.33,27.613 34.49,27.613 35.052,27.051 35.052,14.351 ; P5.1@17.653,38.977 ccw(c17.653,40.174) 18.5,39.328 ccw(c19.346,38.481) P5.1@18.149,38.481 ; C2.1@33.716,14.351 35.679,14.351 P1.22@37.33,12.7 ; C2.1@34.067,14 cw(c34.913,13.154) 34.913,14.351 cw(c34.913,15.548) C2.1@34.067,14.702 ; P1.22@36.834,12.7 ccw(c35.637,12.7) 36.483,13.547 ccw(c37.33,14.393) P1.22@37.33,13.196
VDLY_DRIVER: P2.28 R57.1 | length 91.7
  Top Layer w0.254: R57.1@45.339,-2.016 45.355,-2.032 v1(46.482,-2.032) ; R57.1@45.853,-2.353 cw(c46.482,-2.81) v1(46.482,-2.032) ; R57.1@45.868,-1.701 ccw(c46.482,-1.296) v1(46.482,-2.032) ; v1@46.327,-2.108 ccw(c46.028,-2.255) 46.114,-1.933 ccw(c46.2,-1.612) v1@46.386,-1.888 ; v1@46.33,-1.949 cw(c45.994,-1.767) 46.093,-2.136 cw(c46.192,-2.505) v1@46.392,-2.179 ; v1@46.36,-2.154 ccw(c46.064,-2.45) 46.064,-2.032 ccw(c46.064,-1.614) v1@46.36,-1.91
  Bottom Layer w0.254: v1(46.482,-2.032) 47.625,-2.032 48.387,-2.794 49.403,-2.794 52.124,-0.073 109.789,-0.073 112.106,2.244 112.106,10.816 P2.28@116.53,15.24 ; v1@46.604,-2.154 cw(c46.9,-2.45) 46.9,-2.032 cw(c46.9,-1.614) v1@46.604,-1.91 ; P2.28@115.907,15.24 cw(c114.403,15.24) 115.466,14.176 cw(c116.53,13.113) P2.28@116.53,14.617 ; P2.28@116.161,15.24 cw(c115.27,15.24) 115.9,14.61 cw(c116.53,13.98) P2.28@116.53,14.871
VDRIVER_OUT1: P2.25 R58.1 | length 72.4
  Top Layer w0.254: R58.1@64.22,-2.016 64.871,-2.667 v1(65.405,-2.667) ; v1@65.283,-2.789 ccw(c64.987,-3.085) 64.987,-2.667 ccw(c64.987,-2.249) v1@65.283,-2.545
  Bottom Layer w0.254: v1(65.405,-2.667) 67.545,-0.527 109.977,-0.527 112.56,2.056 112.56,10.325 116.078,13.843 117.927,13.843 P2.25@119.07,12.7 ; v1@65.405,-2.494 ccw(c65.405,-2.076) 65.7,-2.372 ccw(c65.996,-2.667) v1@65.578,-2.667 ; P2.25@118.447,12.7 ccw(c116.943,12.7) 118.006,13.764 ccw(c119.07,14.827) P2.25@119.07,13.323 ; P2.25@118.701,12.7 ccw(c117.81,12.7) 118.44,13.33 ccw(c119.07,13.96) P2.25@119.07,13.069
VDRIVER_OUT2: P2.26 R59.1 | length 71.7
  Top Layer w0.254: R59.1@61.468,-2.016 62.119,-2.667 v1(62.611,-2.667) ; v1@62.489,-2.789 ccw(c62.193,-3.085) 62.193,-2.667 ccw(c62.193,-2.249) v1@62.489,-2.545
  Bottom Layer w0.254: v1@62.611,-2.84 cw(c62.611,-3.258) 62.906,-2.962 cw(c63.202,-2.667) v1@62.784,-2.667 ; v1(62.611,-2.667) 63.373,-3.429 65.786,-3.429 68.234,-0.981 110.165,-0.981 113.014,1.868 113.014,9.184 P2.26@116.53,12.7 ; P2.26@115.907,12.7 cw(c114.403,12.7) 115.466,11.636 cw(c116.53,10.573) P2.26@116.53,12.077 ; P2.26@116.161,12.7 cw(c115.27,12.7) 115.9,12.07 cw(c116.53,11.44) P2.26@116.53,12.331
VDRIVER_OUT3: P2.23 R60.1 | length 66.6
  Top Layer w0.254: R60.1@69.723,-2.143 70.247,-2.667 v1(70.866,-2.667) ; v1@70.744,-2.789 ccw(c70.448,-3.085) 70.448,-2.667 ccw(c70.448,-2.249) v1@70.744,-2.545
  Bottom Layer w0.254: v1@70.866,-2.748 ccw(c70.866,-2.041) 71.366,-2.541 ; v1(70.866,-2.667) 71.24,-2.667 ; v1@70.866,-2.494 ccw(c70.866,-1.174) 71.8,-2.107 ; v1@70.998,-2.779 cw(c71.24,-2.985) 71.24,-2.667 ; v1@70.998,-2.555 ccw(c71.24,-2.349) 71.24,-2.667 ; P2.23@118.447,10.16 ccw(c116.943,10.16) 118.006,11.224 ccw(c119.07,12.287) P2.23@119.07,10.783 ; P2.23@118.701,10.16 ccw(c117.81,10.16) 118.44,10.79 ccw(c119.07,11.42) P2.23@119.07,10.529 ; P2.23@119.07,10.16 117.8,11.43 116.205,11.43 113.468,8.693 113.468,1.68 110.353,-1.435 72.472,-1.435 71.24,-2.667
VDRIVER_OUT4: P2.24 R61.1 | length 64.4
  Top Layer w0.254: R61.1@66.971,-2.143 67.622,-2.794 v1(68.199,-2.794) ; v1@68.077,-2.916 ccw(c67.781,-3.212) 67.781,-2.794 ccw(c67.781,-2.376) v1@68.077,-2.672
  Bottom Layer w0.254: v1@68.199,-2.967 cw(c68.199,-3.385) 68.494,-3.089 cw(c68.79,-2.794) v1@68.372,-2.794 ; v1(68.199,-2.794) 68.961,-3.556 70.993,-3.556 72.66,-1.889 110.541,-1.889 113.922,1.492 113.922,7.552 P2.24@116.53,10.16 ; P2.24@115.907,10.16 cw(c114.403,10.16) 115.466,9.096 cw(c116.53,8.033) P2.24@116.53,9.537 ; P2.24@116.161,10.16 cw(c115.27,10.16) 115.9,9.53 cw(c116.53,8.9) P2.24@116.53,9.791
VDRIVER_OUT5: P2.21 R62.1 | length 46.3
  Top Layer w0.254: R62.1@85.725,-2.143 86.249,-2.667 v1(86.868,-2.667) ; v1@86.746,-2.789 ccw(c86.45,-3.085) 86.45,-2.667 ccw(c86.45,-2.249) v1@86.746,-2.545
  Bottom Layer w0.254: v1(86.868,-2.667) 87.376,-2.667 87.7,-2.343 110.729,-2.343 114.376,1.304 114.376,7.061 116.078,8.763 118.11,8.763 ; v1@86.99,-2.789 cw(c87.286,-3.085) 87.286,-2.667 cw(c87.286,-2.249) v1@86.99,-2.545 ; 118.319,8.554 ccw(c119.07,9.305) P2.21@119.07,8.243 ; P2.21@118.454,7.714 ccw(c117.246,7.898) 118.11,8.763 ; 118.465,8.408 cw(c117.861,7.804) P2.21@118.705,7.676 ; P2.21@119.07,7.62 119.07,7.803 118.11,8.763
VDRIVER_OUT6: P2.22 R63.1 | length 43
  Top Layer w0.254: R63.1@82.931,-2.143 83.455,-2.667 v1(84.074,-2.667) ; v1@83.952,-2.789 ccw(c83.656,-3.085) 83.656,-2.667 ccw(c83.656,-2.249) v1@83.952,-2.545
  Bottom Layer w0.254: v1@84.074,-2.84 cw(c84.074,-3.258) 84.369,-2.962 cw(c84.665,-2.667) v1@84.247,-2.667 ; v1(84.074,-2.667) 85.09,-3.683 87.122,-3.683 88.008,-2.797 110.917,-2.797 114.83,1.116 114.83,5.92 P2.22@116.53,7.62
VDRIVER_OUT7: P2.19 R64.1 | length 43.9
  Top Layer w0.254: R64.1@91.313,-2.143 92.528,-3.358 92.71,-3.175 v1(92.71,-3.429) ; R64.1@91.363,-2.716 cw(c91.363,-3.979) 92.256,-3.086 ; R64.1@91.682,-2.143 ccw(c92.573,-2.143) R64.1@91.943,-2.773 ; R64.1@91.936,-2.143 ccw(c93.44,-2.143) 92.377,-3.207 ; 92.225,-3.055 ccw(c92.71,-2.57) v1@92.71,-3.256
  Bottom Layer w0.254: v1(92.71,-3.429) 93.599,-3.429 93.777,-3.251 111.105,-3.251 115.284,0.928 115.284,5.732 116.029,6.477 117.729,6.477 119.07,5.136 P2.19@119.07,5.08 ; v1@92.832,-3.551 cw(c93.128,-3.847) 93.128,-3.429 cw(c93.128,-3.011) v1@92.832,-3.307 ; 117.967,6.239 cw(c116.808,5.08) P2.19@118.447,5.08 ; 118.102,6.104 ccw(c119.07,7.072) P2.19@119.07,5.703 ; 118.4,5.806 cw(c117.675,5.08) P2.19@118.701,5.08 ; 118.536,5.67 ccw(c119.07,6.205) P2.19@119.07,5.449
VDRIVER_OUT8: P2.17 R65.1 | length 42.8
  Top Layer w0.254: R65.1@88.519,-2.143 88.519,-2.286 v1(89.662,-3.429) cw(c90.918,-2.173) R65.1@89.142,-2.15 ; R65.1@88.569,-2.716 cw(c88.569,-3.633) 89.218,-2.985 ; R65.1@88.888,-2.147 ccw(c90.077,-2.162) 89.236,-3.003 ; v1@89.489,-3.429 ccw(c89.071,-3.429) 89.367,-3.134 ccw(c89.662,-2.838) v1@89.662,-3.256 ; v1@89.495,-3.384 ccw(c89.092,-3.276) 89.453,-3.067 ccw(c89.815,-2.858) v1@89.707,-3.262
  Bottom Layer w0.254: v1@89.662,-3.602 cw(c89.662,-4.02) 89.957,-3.724 cw(c90.253,-3.429) v1@89.835,-3.429 ; v1(89.662,-3.429) 90.678,-4.445 97.409,-4.445 98.149,-3.705 111.293,-3.705 116.141,1.143 117.983,1.143 ; 118.358,1.518 ccw(c117.506,2.369) P2.17@118.703,2.5 ; P2.17@118.451,2.472 cw(c116.831,2.295) 117.983,1.143 ; 118.536,1.696 cw(c119.07,1.161) P2.17@119.07,1.917 ; P2.17@119.07,2.54 119.07,2.23 117.983,1.143
VDRIVER_OUT9: P2.16 R66.1 | length 30.6
  Top Layer w0.254: R66.1@107.56,-2.456 ccw(c108.682,-1.334) 108.682,-2.921 ; R66.1@107.739,-2.277 ccw(c109.295,-0.721) 109.295,-2.921 ; R66.1@107.823,-2.143 108.601,-2.921 ; R66.1@107.919,-2.097 ccw(c109.908,-0.108) 109.908,-2.921 ; R66.1@107.958,-2.71 cw(c108.07,-3.452) 108.601,-2.921 ; R66.1@108.099,-1.917 ccw(c110.521,0.505) 110.521,-2.921 ; R66.1@108.278,-1.738 ccw(c111.135,1.119) 111.135,-2.921 ; R66.1@108.428,-2.286 ccw(c109.07,-2.452) 108.601,-2.921 ; v1@112.908,-3.043 ccw(c112.612,-3.339) 112.612,-2.921 ccw(c112.612,-2.503) v1@112.908,-2.799 ; v1(113.03,-2.921) 108.601,-2.921
  Bottom Layer w0.254: v1(113.03,-2.921) 115.697,-0.254 ; v1@113.03,-2.748 ccw(c113.03,-2.33) 113.325,-2.626 ccw(c113.621,-2.921) v1@113.203,-2.921 ; 114.478,-1.473 cw(c116.53,-3.525) P2.16@116.53,-0.623 ; 114.912,-1.039 cw(c116.53,-2.658) P2.16@116.53,-0.369 ; 115.345,-0.606 cw(c116.53,-1.79) P2.16@116.53,-0.115 ; 115.779,-0.172 cw(c116.53,-0.923) P2.16@116.53,0.139 ; P2.16@116.069,-0.419 ccw(c115.697,-0.756) 115.697,-0.254 ; P2.16@116.53,0 116.276,-0.254 115.697,-0.254
VDRIVER_OUT10: P2.15 R67.1 | length 24.1
  Top Layer w0.254: R67.1@105.029,-2.143 106.434,-3.548 113.673,-3.548 v1(114.3,-2.921) ; R67.1@105.079,-2.716 cw(c105.079,-3.979) 105.972,-3.086 ; R67.1@105.398,-2.143 ccw(c106.289,-2.143) R67.1@105.659,-2.773 ; R67.1@105.652,-2.143 ccw(c107.156,-2.143) 106.093,-3.207 ; v1@114.127,-2.921 cw(c113.709,-2.921) 114.005,-3.216 cw(c114.3,-3.512) v1@114.3,-3.094
  Bottom Layer w0.254: v1(114.3,-2.921) 115.951,-1.27 117.856,-1.27 119.07,-0.056 P2.15@119.07,0 ; v1@114.3,-2.748 ccw(c114.3,-2.33) 114.595,-2.626 ccw(c114.891,-2.921) v1@114.473,-2.921 ; 117.967,-1.159 ccw(c116.808,0) P2.15@118.447,0 ; 118.102,-1.024 cw(c119.07,-1.992) P2.15@119.07,-0.623 ; 118.4,-0.726 ccw(c117.675,0) P2.15@118.701,0 ; 118.536,-0.59 cw(c119.07,-1.125) P2.15@119.07,-0.369
VLV_DLY_DRIVER_ON: K2.3 LR5.1 P3.21 | length 37.1
  Top Layer w0.508: K2.3@57.696,26.424 59.69,26.424 61.006,27.74 65.459,27.74 66.548,28.829 69.596,28.829 71.262,30.495 P3.21@71.735,30.495 ; K2.3@58.082,26.038 cw(c59.014,25.106) 59.014,26.424 cw(c59.014,27.742) K2.3@58.082,26.81 ; 69.825,29.058 cw(c71.735,27.148) P3.21@71.735,29.849 ; 70.692,29.925 cw(c71.735,28.882) P3.21@71.735,30.357
  Bottom Layer w0.508: LR5.1@51.135,35.831 cw(c50.374,35.069) 51.45,35.069 cw(c52.527,35.069) LR5.1@51.766,35.831 ; LR5.1@51.45,36.146 51.45,32.67 K2.3@57.696,26.424 ; K2.3@57.15,26.424 ccw(c55.832,26.424) 56.764,27.356 ccw(c57.696,28.288) K2.3@57.696,26.97
VLV_MAIN_DRIVER_ON: K1.3 LR4.1 P3.23 | length 38.2
  Top Layer w0.508: K1.3@52.696,26.424 55.245,26.424 57.269,28.448 64.516,28.448 66.563,30.495 ; K1.3@53.082,26.038 cw(c54.014,25.106) 54.014,26.424 cw(c54.014,27.742) K1.3@53.082,26.81 ; P3.23@67.425,30.086 ccw(c66.563,29.382) 66.563,30.495 ; P3.23@67.425,30.904 cw(c66.563,31.608) 66.563,30.495 ; P3.23@67.925,30.495 66.563,30.495
  Bottom Layer w0.508: LR4.1@45.085,36.146 47.117,34.114 47.117,30.48 51.173,26.424 K1.3@52.696,26.424 ; LR4.1@45.831,36.146 ccw(c47.632,36.146) 46.359,34.872 ; K1.3@52.31,26.038 ccw(c51.378,25.106) 51.378,26.424 ccw(c51.378,27.742) K1.3@52.31,26.81
VMAIN_DRIVER: P2.27 R56.1 | length 92.4
  Top Layer w0.254: R56.1@48.133,-2.016 48.149,-2.032 v1(49.276,-2.032) ; R56.1@48.647,-2.353 cw(c49.276,-2.81) v1(49.276,-2.032) ; R56.1@48.662,-1.701 ccw(c49.276,-1.296) v1(49.276,-2.032) ; v1@49.121,-2.108 ccw(c48.822,-2.255) 48.908,-1.933 ccw(c48.994,-1.612) v1@49.18,-1.888 ; v1@49.124,-1.949 cw(c48.788,-1.767) 48.887,-2.136 cw(c48.986,-2.505) v1@49.186,-2.179 ; v1@49.154,-2.154 ccw(c48.858,-2.45) 48.858,-2.032 ccw(c48.858,-1.614) v1@49.154,-1.91
  Bottom Layer w0.254: v1(49.276,-2.032) 51.689,0.381 109.601,0.381 111.652,2.432 111.652,12.08 115.955,16.383 117.927,16.383 P2.27@119.07,15.24 ; v1@49.276,-1.859 ccw(c49.276,-1.441) 49.571,-1.737 ccw(c49.867,-2.032) v1@49.449,-2.032 ; P2.27@118.447,15.24 ccw(c116.943,15.24) 118.006,16.304 ccw(c119.07,17.367) P2.27@119.07,15.863 ; P2.27@118.701,15.24 ccw(c117.81,15.24) 118.44,15.87 ccw(c119.07,16.5) P2.27@119.07,15.609
VPC3_48MHZ: U3.5 Y2.3 | length 6.2
  Top Layer w0.254: U3.5@24.586,9.543 ccw(c24.369,9.76) 24.676,9.76 ccw(c24.983,9.76) U3.5@24.766,9.543 ; U3.5@24.676,8.582 24.676,10.96 Y2.3@25.684,11.968 ; 24.871,11.155 cw(c25.965,10.06) Y2.3@25.965,11.608 ; 25.304,11.588 cw(c25.965,10.928) Y2.3@25.965,11.862
VPC3_ALE: U2.52 U3.24 | length 29
  Top Layer w0.254: U2.52@12.228,16.888 12.228,13.371 10.684,11.827 10.684,6.555 11.554,5.685 11.554,4.187 13.805,1.936 13.805,-0.597 16.002,-2.794 20.32,-2.794 20.701,-3.175 U3.24@20.701,-4.518 ; U3.24@20.586,-3.557 ccw(c20.309,-3.28) 20.701,-3.28
VPC3_RST: U2.23 U3.36 | length 55.1
  Top Layer w0.254: U2.23@15.228,28.088 15.228,29.466 16.256,30.494 v1(16.256,31.505) ; v1@16.134,31.383 cw(c15.838,31.088) 16.256,31.088 cw(c16.674,31.088) v1@16.378,31.383 ; U3.36@30.426,-0.368 33.287,-0.368 34.347,0.692 34.347,9.129 33.401,10.075 v1(33.401,11.176) ; U3.36@31.387,-0.458 cw(c31.604,-0.675) 31.604,-0.368 cw(c31.604,-0.061) U3.36@31.387,-0.278 ; v1@33.279,11.054 cw(c32.983,10.758) 33.401,10.758 cw(c33.819,10.758) v1@33.523,11.054
  Bottom Layer w0.254: v1(16.256,31.505) 16.32,31.569 18.864,31.569 19.904,30.529 19.904,27.467 21.374,25.997 28.204,25.997 29.429,24.772 29.429,22.55 29.426,22.547 29.426,22.362 33.401,18.387 v1(33.401,11.176) ; v1@16.378,31.383 cw(c16.827,30.934) 16.827,31.569 ; v1@33.279,11.298 ccw(c32.983,11.594) 33.401,11.594 ccw(c33.819,11.594) v1@33.523,11.298
VPC3_RTS: R7.2 U3.27 U4.4 U4.5 | length 26
  Top Layer w0.254: U4.4@12.17,-5.207 v1(14.097,-5.207) ; U4.5@12.17,-3.937 13.843,-3.937 14.097,-4.191 v1(14.097,-5.207) ; U4.4@13.142,-5.329 cw(c13.438,-5.625) 13.438,-5.207 cw(c13.438,-4.789) U4.4@13.142,-5.085 ; U4.5@13.142,-4.059 cw(c13.438,-4.355) 13.438,-3.937 cw(c13.438,-3.519) U4.5@13.142,-3.815 ; v1@13.975,-5.329 ccw(c13.679,-5.625) 13.679,-5.207 ccw(c13.679,-4.789) 13.975,-5.085 ccw(c13.679,-4.789) 14.097,-4.789 ccw(c14.515,-4.789) v1@14.219,-5.085 ; v1@14.097,-5.38 cw(c14.097,-5.798) 14.392,-5.502 cw(c14.688,-5.207) v1@14.27,-5.207 ; R7.2@15.764,-7.366 15.24,-6.842 15.24,-6.35 v1(14.097,-5.207) ; U3.27@22.986,-5.479 cw(c22.678,-5.787) 23.114,-5.787 ; v1@22.992,-7.117 ccw(c22.696,-6.821) 23.114,-6.821 ccw(c23.532,-6.821) v1@23.236,-7.117 ; v1(23.114,-7.239) U3.27@23.114,-4.518
  Bottom Layer w0.254: v1@14.097,-5.38 cw(c14.097,-5.815) 14.404,-5.507 ; v1(14.097,-5.207) 14.104,-5.207 16.136,-7.239 v1(23.114,-7.239) ; v1@14.27,-5.207 ccw(c14.671,-5.207) 14.387,-5.49 ; v1@22.992,-7.361 ccw(c22.696,-7.657) 22.696,-7.239 ccw(c22.696,-6.821) v1@22.992,-7.117
VPC3_RXD: U3.30 U4.3 | length 20.4
  Top Layer w0.254: U4.3@12.17,-6.477 v1(14.097,-6.477) ; U4.3@13.142,-6.599 cw(c13.438,-6.895) 13.438,-6.477 cw(c13.438,-6.059) U4.3@13.142,-6.355 ; v1@13.975,-6.599 ccw(c13.679,-6.895) 13.679,-6.477 ccw(c13.679,-6.059) v1@13.975,-6.355 ; v1@25.354,-6.66 ccw(c25.058,-6.364) 25.476,-6.364 ccw(c25.894,-6.364) v1@25.598,-6.66 ; U3.30@25.386,-5.479 cw(c25.169,-5.696) 25.476,-5.696 cw(c25.783,-5.696) U3.30@25.566,-5.479 ; v1@25.438,-6.82 v1(25.476,-6.782) U3.30@25.476,-4.518
  Bottom Layer w0.254: v1@14.097,-6.65 cw(c14.097,-7.068) 14.392,-6.772 cw(c14.688,-6.477) v1@14.27,-6.477 ; v1(14.097,-6.477) 15.494,-7.874 24.384,-7.874 v1(25.476,-6.782) ; v1@25.303,-6.782 cw(c24.885,-6.782) 25.181,-7.077 cw(c25.476,-7.373) v1@25.476,-6.955
VPC3_TXD: U3.26 U4.6 | length 18.2
  Top Layer w0.254: U4.6@12.17,-2.667 13.97,-2.667 v1(15.113,-3.81) ; U4.6@13.142,-2.789 cw(c13.438,-3.085) 13.438,-2.667 cw(c13.438,-2.249) U4.6@13.142,-2.545 ; v1@14.94,-3.81 ccw(c14.522,-3.81) 14.818,-3.515 ccw(c15.113,-3.219) v1@15.113,-3.637 ; v1@22.154,-6.355 ccw(c21.858,-6.059) 22.276,-6.059 ccw(c22.694,-6.059) v1@22.398,-6.355 ; U3.26@22.186,-5.479 cw(c21.969,-5.696) 22.276,-5.696 cw(c22.583,-5.696) U3.26@22.366,-5.479 ; v1(22.276,-6.477) U3.26@22.276,-4.518
  Bottom Layer w0.254: v1@14.991,-3.932 cw(c14.695,-4.228) 15.113,-4.228 cw(c15.531,-4.228) v1@15.235,-3.932 ; v1(15.113,-3.81) 15.113,-5.207 16.383,-6.477 v1(22.276,-6.477) ; v1@22.154,-6.599 ccw(c21.858,-6.895) 21.858,-6.477 ccw(c21.858,-6.059) v1@22.154,-6.355
VPC3_XINT: U2.14 U3.9 | length 22.2
  Top Layer w0.254: U2.14@20.078,25.238 17.872,25.238 17.145,24.511 17.145,20.075 19.685,17.535 19.685,11.167 20.057,10.795 21.336,10.795 21.463,10.668 U3.9@21.463,8.582 ; U3.9@21.386,9.543 ccw(c21.201,9.728) 21.463,9.728 ; 21.463,9.791 ccw(c21.814,9.791) U3.9@21.566,9.543
VPC3_XRD: U2.53 U3.4 | length 21.9
  Top Layer w0.254: U2.53@12.728,16.888 12.728,14.069 13.081,13.716 14.859,13.716 16.129,12.446 v1(17.145,12.446) ; v1@17.023,12.324 ccw(c16.727,12.028) 16.727,12.446 ccw(c16.727,12.864) v1@17.023,12.568 ; v1@25.354,10.419 cw(c25.058,10.123) 25.476,10.123 cw(c25.894,10.123) v1@25.598,10.419 ; U3.4@25.386,9.543 ccw(c25.169,9.76) 25.476,9.76 ccw(c25.783,9.76) U3.4@25.566,9.543 ; U3.4@25.476,8.582 v1(25.476,10.541)
  Bottom Layer w0.254: v1@17.145,12.273 cw(c17.145,11.855) 17.44,12.151 cw(c17.736,12.446) v1@17.318,12.446 ; v1(17.145,12.446) 18.288,11.303 21.971,11.303 22.679,10.595 25.403,10.595 v1(25.476,10.541) ; 24.928,10.595 cw(c24.928,9.993) v1@25.354,10.419
VPC3_XREADY: U2.22 U3.14 | length 30.4
  Top Layer w0.254: 14.224,12.05 cw(c15.509,12.05) v1@14.6,12.959 ; 14.224,12.663 cw(c14.896,12.663) v1@14.421,13.138 ; v1@14.306,13.062 cw(c14.022,13.03) 14.224,12.827 ; v1@14.459,12.909 ccw(c14.427,12.625) 14.224,12.827 ; v1(14.478,13.081) 14.224,12.827 ; v1(14.986,22.234) 15.728,22.976 U2.22@15.728,28.088 ; v1@14.986,22.407 ccw(c14.986,22.825) 15.281,22.53 ccw(c15.577,22.234) v1@15.159,22.234 ; 16.094,4.455 cw(c16.094,4.071) U3.14@16.365,4.342 ; U3.14@17.072,4.455 15.915,4.455 14.732,5.637 14.732,7.491 14.224,7.999 14.224,12.827
  Bottom Layer w0.254: v1@14.356,13.203 ccw(c14.06,13.499) 14.478,13.499 ccw(c14.896,13.499) v1@14.6,13.203 ; v1(14.478,13.081) 14.478,15.494 14.981,15.997 14.981,20.874 14.986,20.879 v1(14.986,22.234) ; v1@14.864,22.112 cw(c14.568,21.817) 14.986,21.817 cw(c15.404,21.817) v1@15.108,22.112
VPC3_XWR: U2.2 U3.2 | length 18.1
  Top Layer w0.254: U2.2@20.078,19.238 21.067,19.238 21.074,19.245 21.531,19.245 21.717,19.431 24.377,19.431 28.448,15.36 28.448,13.208 27.686,12.446 27.686,10.668 27.059,10.041 27.059,8.599 U3.2@27.076,8.582 U3.2@27.076,8.455 ; U3.2@26.986,9.543 ccw(c26.81,9.719) 27.059,9.719 ; 27.059,9.801 ccw(c27.424,9.801) U3.2@27.166,9.543